# EAGLE board stripboard (EAGLE 7.7.0)
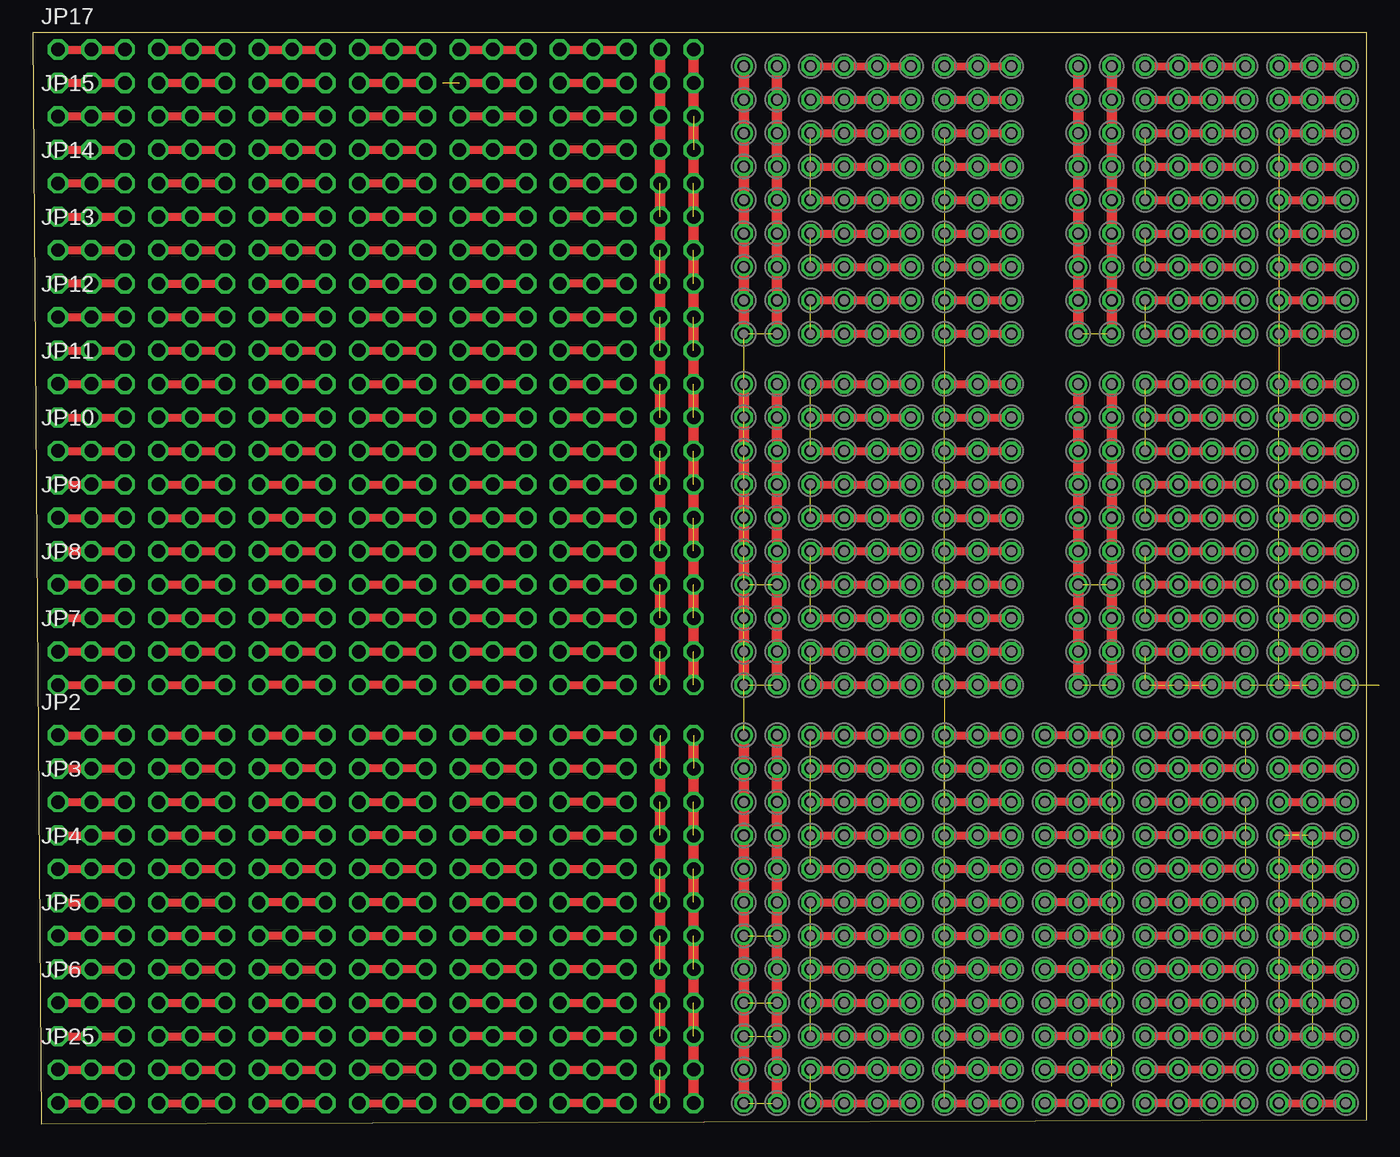
[diagram p0: board, top side]

Size 101.27 x 82.86 mm. Coordinates in mm from the lower left corner, seen from the top.
Outline: 0.64,0 101.27,0.32 101.27,82.86 0,82.86 0.64,0
Copper layers (1*16): Top 0.035mm / dielectric 1.5mm / Bottom 0.035mm
Design rules "default": minimum track width 10mil, minimum drill 24mil, track to track 8mil, track to pad 8mil, pad to pad 8mil, via to via 8mil, smd to smd 8mil, copper to edge 40mil, drill to drill 8mil, minimum pad ring 10mil, minimum via ring 8mil, stop-mask expansion 4mil, vias tented up to drill 0mil, thermal gap 10mil

## Footprints (pad centres in the part's own frame; a part is rotated, then mirrored left to right if it is on the bottom)
FE09-2 = drill 0.914: 1 -10.16,1.27 | drill 0.914 octagon: 2 -10.16,-1.27; 3 -7.62,1.27; 4 -7.62,-1.27; 5 -5.08,1.27; 6 -5.08,-1.27; 7 -2.54,1.27; 8 -2.54,-1.27; 9 0,1.27; 10 0,-1.27; 11 2.54,1.27; 12 2.54,-1.27; 13 5.08,1.27; 14 5.08,-1.27; 15 7.62,1.27; 16 7.62,-1.27; 17 10.16,1.27; 18 10.16,-1.27
2X20 = drill 1.016 octagon: 1 -24.13,-1.27; 2 -24.13,1.27; 3 -21.59,-1.27; 4 -21.59,1.27; 5 -19.05,-1.27; 6 -19.05,1.27; 7 -16.51,-1.27; 8 -16.51,1.27; 9 -13.97,-1.27; 10 -13.97,1.27; 11 -11.43,-1.27; 12 -11.43,1.27; 13 -8.89,-1.27; 14 -8.89,1.27; 15 -6.35,-1.27; 16 -6.35,1.27; 17 -3.81,-1.27; 18 -3.81,1.27; 19 -1.27,-1.27; 20 -1.27,1.27; 21 1.27,-1.27; 22 1.27,1.27; 23 3.81,-1.27; 24 3.81,1.27; 25 6.35,-1.27; 26 6.35,1.27; 27 8.89,-1.27; 28 8.89,1.27; 29 11.43,-1.27; 30 11.43,1.27; 31 13.97,-1.27; 32 13.97,1.27; 33 16.51,-1.27; 34 16.51,1.27; 35 19.05,-1.27; 36 19.05,1.27; 37 21.59,-1.27; 38 21.59,1.27; 39 24.13,-1.27; 40 24.13,1.27

## Placement (x,y rotation side)
E$1  [FE09-2]  64.14,73.98 0 top
E$2  [FE09-2]  64.14,68.9 0 top
E$3  [FE09-2]  64.14,68.9 0 top
E$4  [FE09-2]  64.14,63.82 0 top
E$5  [FE09-2]  64.14,79.06 0 top
E$6  [FE09-2]  89.54,73.98 0 top
E$7  [FE09-2]  89.54,68.9 0 top
E$8  [FE09-2]  89.54,68.9 0 top
E$9  [FE09-2]  64.14,63.82 0 top
E$10  [FE09-2]  64.14,61.28 0 top
E$11  [FE09-2]  64.14,61.28 0 top
E$12  [FE09-2]  64.14,54.93 0 top
E$13  [FE09-2]  89.54,63.82 0 top
E$14  [FE09-2]  89.54,63.82 0 top
E$15  [FE09-2]  89.54,61.28 0 top
E$16  [FE09-2]  89.54,61.28 0 top
E$17  [FE09-2]  64.14,54.93 0 top
E$18  [FE09-2]  64.14,49.85 0 top
E$19  [FE09-2]  64.14,49.85 0 top
E$20  [FE09-2]  64.14,44.77 0 top
E$21  [FE09-2]  89.54,54.93 0 top
E$22  [FE09-2]  89.54,54.93 0 top
E$23  [FE09-2]  89.54,49.85 0 top
E$24  [FE09-2]  89.54,49.85 0 top
E$25  [FE09-2]  64.14,44.77 0 top
E$26  [FE09-2]  64.14,39.69 0 top
E$27  [FE09-2]  64.14,39.69 0 top
E$28  [FE09-2]  64.14,34.61 0 top
E$29  [FE09-2]  89.54,44.77 0 top
E$30  [FE09-2]  89.54,44.77 0 top
E$31  [FE09-2]  89.54,39.69 0 top
E$32  [FE09-2]  89.54,39.69 0 top
E$33  [FE09-2]  89.54,34.61 0 top
E$34  [FE09-2]  89.54,79.06 0 top
E$35  [FE09-2]  64.14,28.26 0 top
E$36  [FE09-2]  64.14,28.26 0 top
E$37  [FE09-2]  64.14,23.18 0 top
E$38  [FE09-2]  64.14,23.18 0 top
E$39  [FE09-2]  64.14,18.1 0 top
E$40  [FE09-2]  64.14,18.1 0 top
E$41  [FE09-2]  64.14,13.02 0 top
E$42  [FE09-2]  64.14,13.02 0 top
E$43  [FE09-2]  64.14,7.94 0 top
E$44  [FE09-2]  64.14,23.18 0 top
E$45  [FE09-2]  64.14,23.18 0 top
E$46  [FE09-2]  64.14,18.1 0 top
E$47  [FE09-2]  64.14,18.1 0 top
E$48  [FE09-2]  64.14,13.02 0 top
E$49  [FE09-2]  64.14,13.02 0 top
E$50  [FE09-2]  64.14,7.94 0 top
E$51  [FE09-2]  64.14,7.94 0 top
E$52  [FE09-2]  64.14,2.86 0 top
E$53  [FE09-2]  87,7.94 180 top
E$54  [FE09-2]  87,7.94 180 top
E$55  [FE09-2]  87,13.02 180 top
E$56  [FE09-2]  87,13.02 180 top
E$57  [FE09-2]  87,18.1 180 top
E$58  [FE09-2]  87,18.1 180 top
E$59  [FE09-2]  87,23.18 180 top
E$60  [FE09-2]  87,23.18 180 top
E$61  [FE09-2]  87,28.26 180 top
E$62  [FE09-2]  87,2.86 180 top
E$63  [FE09-2]  98.43,19.37 90 top
E$64  [FE09-2]  98.43,11.75 90 top
JP2  [2X20]  26.04,28.26 0 top
JP3  [2X20]  26.04,23.18 0 top
JP4  [2X20]  26.04,18.1 0 top
JP5  [2X20]  26.04,13.02 0 top
JP6  [2X20]  26.04,7.94 0 top
JP7  [2X20]  26.04,34.61 0 top
JP8  [2X20]  26.04,39.69 0 top
JP9  [2X20]  26.04,44.77 0 top
JP10  [2X20]  26.04,49.85 0 top
JP11  [2X20]  26.04,54.93 0 top
JP12  [2X20]  26.04,60.01 0 top
JP13  [2X20]  26.04,65.09 0 top
JP14  [2X20]  26.04,70.17 0 top
JP15  [2X20]  26.04,75.25 0 top
JP17  [2X20]  26.04,80.33 0 top
JP25  [2X20]  26.04,2.86 0 top

## Library data of the parts
E$1-E$64 = con-lsta
JP2-JP15 JP17 JP25 = adafruit

## Nets
N$1: JP25.2 JP25.6
N$2: JP25.8 JP25.12
N$3: JP25.14 JP25.18
N$4: JP25.20 JP25.24
N$5: JP25.26 JP25.30
N$6: JP25.32 JP25.36
N$7: JP25.37 JP25.38
N$9: JP25.1 JP25.5
N$10: JP25.7 JP25.11
N$11: JP25.13 JP25.17
N$12: JP25.19 JP25.23
N$13: JP25.25 JP25.29
N$14: JP25.31 JP25.35
N$29: JP2.2 JP2.6
N$30: JP2.8 JP2.12
N$31: JP2.14 JP2.18
N$32: JP2.20 JP2.24
N$33: JP2.26 JP2.30
N$34: JP2.32 JP2.36
N$35: JP2.37 JP2.38
N$36: JP2.39 JP2.40
N$37: JP2.1 JP2.5
N$38: JP2.7 JP2.11
N$39: JP2.13 JP2.17
N$40: JP2.19 JP2.23
N$41: JP2.25 JP2.29
N$42: JP2.31 JP2.35
N$43: JP3.2 JP3.6
N$44: JP3.8 JP3.12
N$45: JP3.14 JP3.18
N$46: JP3.20 JP3.24
N$47: JP3.26 JP3.30
N$48: JP3.32 JP3.36
N$49: JP3.37 JP3.38
N$50: JP3.39 JP3.40
N$51: JP3.1 JP3.5
N$52: JP3.7 JP3.11
N$53: JP3.13 JP3.17
N$54: JP3.19 JP3.23
N$55: JP3.25 JP3.29
N$56: JP3.31 JP3.35
N$57: JP4.2 JP4.6
N$58: JP4.8 JP4.12
N$59: JP4.14 JP4.18
N$60: JP4.20 JP4.24
N$61: JP4.26 JP4.30
N$62: JP4.32 JP4.36
N$63: JP4.37 JP4.38
N$64: JP4.39 JP4.40
N$65: JP4.1 JP4.5
N$66: JP4.7 JP4.11
N$67: JP4.13 JP4.17
N$68: JP4.19 JP4.23
N$69: JP4.25 JP4.29
N$70: JP4.31 JP4.35
N$71: JP5.2 JP5.6
N$72: JP5.8 JP5.12
N$73: JP5.14 JP5.18
N$74: JP5.20 JP5.24
N$75: JP5.26 JP5.30
N$76: JP5.32 JP5.36
N$77: JP5.37 JP5.38
N$78: JP5.39 JP5.40
N$79: JP5.1 JP5.5
N$80: JP5.7 JP5.11
N$81: JP5.13 JP5.17
N$82: JP5.19 JP5.23
N$83: JP5.25 JP5.29
N$84: JP5.31 JP5.35
N$85: JP6.2 JP6.6
N$86: JP6.8 JP6.12
N$87: JP6.14 JP6.18
N$88: JP6.20 JP6.24
N$89: JP6.26 JP6.30
N$90: JP6.32 JP6.36
N$91: JP6.37 JP6.38
N$92: JP6.39 JP6.40
N$93: JP6.1 JP6.5
N$94: JP6.7 JP6.11
N$95: JP6.13 JP6.17
N$96: JP6.19 JP6.23
N$97: JP6.25 JP6.29
N$98: JP6.31 JP6.35
N$99: JP7.2 JP7.6
N$100: JP7.8 JP7.12
N$101: JP7.14 JP7.18
N$102: JP7.20 JP7.24
N$103: JP7.26 JP7.30
N$104: JP7.32 JP7.36
N$105: JP7.37 JP7.38
N$106: JP7.39 JP7.40
N$107: JP7.1 JP7.5
N$108: JP7.7 JP7.11
N$109: JP7.13 JP7.17
N$110: JP7.19 JP7.23
N$111: JP7.25 JP7.29
N$112: JP7.31 JP7.35
N$113: JP8.2 JP8.6
N$114: JP8.8 JP8.12
N$115: JP8.14 JP8.18
N$116: JP8.20 JP8.24
N$117: JP8.26 JP8.30
N$118: JP8.32 JP8.36
N$119: JP8.37 JP8.38
N$120: JP8.39 JP8.40
N$121: JP8.1 JP8.5
N$122: JP8.7 JP8.11
N$123: JP8.13 JP8.17
N$124: JP8.19 JP8.23
N$125: JP8.25 JP8.29
N$126: JP8.31 JP8.35
N$127: JP9.2 JP9.6
N$128: JP9.8 JP9.12
N$129: JP9.14 JP9.18
N$130: JP9.20 JP9.24
N$131: JP9.26 JP9.30
N$132: JP9.32 JP9.36
N$133: JP9.37 JP9.38
N$134: JP9.39 JP9.40
N$135: JP9.1 JP9.5
N$136: JP9.7 JP9.11
N$137: JP9.13 JP9.17
N$138: JP9.19 JP9.23
N$139: JP9.25 JP9.29
N$140: JP9.31 JP9.35
N$141: JP10.2 JP10.6
N$142: JP10.8 JP10.12
N$143: JP10.14 JP10.18
N$144: JP10.20 JP10.24
N$145: JP10.26 JP10.30
N$146: JP10.32 JP10.36
N$147: JP10.37 JP10.38
N$148: JP10.39 JP10.40
N$149: JP10.1 JP10.5
N$150: JP10.7 JP10.11
N$151: JP10.13 JP10.17
N$152: JP10.19 JP10.23
N$153: JP10.25 JP10.29
N$154: JP10.31 JP10.35
N$155: JP11.2 JP11.6
N$156: JP11.8 JP11.12
N$157: JP11.14 JP11.18
N$158: JP11.20 JP11.24
N$159: JP11.26 JP11.30
N$160: JP11.32 JP11.36
N$161: JP11.37 JP11.38
N$162: JP11.39 JP11.40
N$163: JP11.1 JP11.5
N$164: JP11.7 JP11.11
N$165: JP11.13 JP11.17
N$166: JP11.19 JP11.23
N$167: JP11.25 JP11.29
N$168: JP11.31 JP11.35
N$169: JP12.2 JP12.6
N$170: JP12.8 JP12.12
N$171: JP12.14 JP12.18
N$172: JP12.20 JP12.24
N$173: JP12.26 JP12.30
N$174: JP12.32 JP12.36
N$175: JP12.37 JP12.38
N$176: JP12.39 JP12.40
N$177: JP12.1 JP12.5
N$178: JP12.7 JP12.11
N$179: JP12.13 JP12.17
N$180: JP12.19 JP12.23
N$181: JP12.25 JP12.29
N$182: JP12.31 JP12.35
N$183: JP13.2 JP13.6
N$184: JP13.8 JP13.12
N$185: JP13.14 JP13.18
N$186: JP13.20 JP13.24
N$187: JP13.26 JP13.30
N$188: JP13.32 JP13.36
N$189: JP13.37 JP13.38
N$190: JP13.39 JP13.40
N$191: JP13.1 JP13.5
N$192: JP13.7 JP13.11
N$193: JP13.13 JP13.17
N$194: JP13.19 JP13.23
N$195: JP13.25 JP13.29
N$196: JP13.31 JP13.35
N$197: JP14.2 JP14.6
N$198: JP14.8 JP14.12
N$199: JP14.14 JP14.18
N$200: JP14.20 JP14.24
N$201: JP14.26 JP14.30
N$202: JP14.32 JP14.36
N$203: JP14.37 JP14.38
N$204: JP14.39 JP14.40
N$205: JP14.1 JP14.5
N$206: JP14.7 JP14.11
N$207: JP14.13 JP14.17
N$208: JP14.19 JP14.23
N$209: JP14.25 JP14.29
N$210: JP14.31 JP14.35
N$211: JP15.2 JP15.6
N$212: JP15.8 JP15.12
N$213: JP15.14 JP15.18
N$214: JP15.20 JP15.24
N$215: JP15.26 JP15.30
N$216: JP15.32 JP15.36
N$218: JP15.39 JP15.40
N$219: JP15.1 JP15.5
N$220: JP15.7 JP15.11
N$221: JP15.13 JP15.17
N$222: JP15.19 JP15.23
N$223: JP15.25 JP15.29
N$224: JP15.31 JP15.35

## Tracks (layer width: path | path; a pad name or v marks a point on that pad's centre or on a via)
N$1
  Top 0.61: JP25.2 JP25.6
N$2
  Top 0.61: JP25.8 JP25.12
N$3
  Top 0.61: JP25.14 JP25.18
N$4
  Top 0.61: JP25.24 JP25.20
N$5
  Top 0.61: JP25.26 JP25.30
N$6
  Top 0.61: JP25.32 JP25.36
N$7  (1 unrouted)
N$8  (1 unrouted)
  Top 0.813: 53.98,40.96 53.98,56.2 | 56.52,40.96 56.52,56.2
N$9
  Top 0.61: JP25.1 JP25.5
N$10
  Top 0.61: JP25.7 JP25.11
N$11
  Top 0.61: JP25.13 JP25.17
N$12
  Top 0.61: JP25.19 JP25.23
N$13
  Top 0.61: JP25.29 JP25.25
N$14
  Top 0.61: JP25.35 JP25.31
N$15  (1 unrouted)
  Top 0.813: 53.98,14.29 53.98,29.53 | 56.52,14.29 56.52,29.53
N$16  (1 unrouted)
  Top 0.61: 59.05,16.83 66.68,16.83 | 59.05,14.29 66.68,14.29
N$17  (1 unrouted)
  Top 0.61: 59.05,21.91 66.68,21.91 | 59.05,19.37 66.68,19.37
N$18  (1 unrouted)
  Top 0.61: 59.05,26.99 66.68,26.99 | 59.05,24.45 66.68,24.45
N$19  (1 unrouted)
  Top 0.61: 59.05,29.53 66.68,29.53 | 59.05,26.99 66.68,26.99
N$20  (10 unrouted)
  Top 0.61: 69.22,29.53 74.3,29.53 | 69.22,26.99 74.3,26.99 | 69.22,24.45 74.3,24.45 | 69.22,21.91 74.3,21.91 | 69.22,19.37 74.3,19.37 | 69.22,16.83 74.3,16.83 | 69.22,14.29 74.3,14.29 | 69.22,11.75 74.3,11.75 | 69.22,9.21 74.3,9.21 | 69.22,6.67 74.3,6.67
N$21  (1 unrouted)
  Top 0.813: 53.98,6.67 53.98,21.91 | 56.52,6.67 56.52,21.91
N$22  (2 unrouted)
  Top 0.813: 53.98,60.01 53.98,80.33 | 56.52,60.01 56.52,80.33
N$23  (1 unrouted)
  Top 0.61: 59.05,9.21 66.68,9.21 | 59.05,6.67 66.68,6.67
N$24  (1 unrouted)
  Top 0.61: 59.05,14.29 66.68,14.29 | 59.05,11.75 66.68,11.75
N$25  (1 unrouted)
  Top 0.813: 53.98,9.21 53.98,24.45 | 56.52,9.21 56.52,24.45
N$26  (1 unrouted)
  Top 0.61: 59.05,11.75 66.68,11.75 | 59.05,9.21 66.68,9.21
N$27  (1 unrouted)
  Top 0.61: 59.05,16.83 66.68,16.83 | 59.05,14.29 66.68,14.29
N$28  (1 unrouted)
  Top 0.61: 59.05,21.91 66.68,21.91 | 59.05,19.37 66.68,19.37
N$29
  Top 0.61: JP2.2 JP2.6
N$30
  Top 0.61: JP2.8 JP2.12
N$31
  Top 0.61: JP2.14 JP2.18
N$32
  Top 0.61: JP2.20 JP2.24
N$33
  Top 0.61: JP2.26 JP2.30
N$34
  Top 0.61: JP2.36 JP2.32
N$35  (1 unrouted)
  Top 0.813: JP2.38 47.62,1.59
N$36  (1 unrouted)
  Top 0.813: JP2.40 50.16,1.59
N$37
  Top 0.61: JP2.1 JP2.5
N$38
  Top 0.61: JP2.7 JP2.11
N$39
  Top 0.61: JP2.17 JP2.13
N$40
  Top 0.61: JP2.23 JP2.19
N$41
  Top 0.61: JP2.25 JP2.29
N$42
  Top 0.61: JP2.31 JP2.35
N$43
  Top 0.61: JP3.2 JP3.6
N$44
  Top 0.61: JP3.8 JP3.12
N$45
  Top 0.61: JP3.14 JP3.18
N$46
  Top 0.61: JP3.20 JP3.24
N$47
  Top 0.61: JP3.30 JP3.26
N$48
  Top 0.61: JP3.36 JP3.32
N$49  (1 unrouted)
N$50  (1 unrouted)
N$51
  Top 0.61: JP3.1 JP3.5
N$52
  Top 0.61: JP3.7 JP3.11
N$53
  Top 0.61: JP3.17 JP3.13
N$54
  Top 0.61: JP3.23 JP3.19
N$55
  Top 0.61: JP3.29 JP3.25
N$56
  Top 0.61: JP3.31 JP3.35
N$57
  Top 0.61: JP4.2 JP4.6
N$58
  Top 0.61: JP4.8 JP4.12
N$59
  Top 0.61: JP4.14 JP4.18
N$60
  Top 0.61: JP4.20 JP4.24
N$61
  Top 0.61: JP4.26 JP4.30
N$62
  Top 0.61: JP4.32 JP4.36
N$63  (1 unrouted)
N$64  (1 unrouted)
N$65
  Top 0.61: JP4.1 JP4.5
N$66
  Top 0.61: JP4.7 JP4.11
N$67
  Top 0.61: JP4.17 JP4.13
N$68
  Top 0.61: JP4.23 JP4.19
N$69
  Top 0.61: JP4.29 JP4.25
N$70
  Top 0.61: JP4.35 JP4.31
N$71
  Top 0.61: JP5.2 JP5.6
N$72
  Top 0.61: JP5.8 JP5.12
N$73
  Top 0.61: JP5.18 JP5.14
N$74
  Top 0.61: JP5.20 JP5.24
N$75
  Top 0.61: JP5.26 JP5.30
N$76
  Top 0.61: JP5.32 JP5.36
N$77  (1 unrouted)
N$78  (1 unrouted)
N$79
  Top 0.61: JP5.1 JP5.5
N$80
  Top 0.61: JP5.7 JP5.11
N$81
  Top 0.61: JP5.13 JP5.17
N$82
  Top 0.61: JP5.23 JP5.19
N$83
  Top 0.61: JP5.29 JP5.25
N$84
  Top 0.61: JP5.35 JP5.31
N$85
  Top 0.61: JP6.2 JP6.6
N$86
  Top 0.61: JP6.8 JP6.12
N$87
  Top 0.61: JP6.14 JP6.18
N$88
  Top 0.61: JP6.20 JP6.24
N$89
  Top 0.61: JP6.26 JP6.30
N$90
  Top 0.61: JP6.32 JP6.36
N$91  (1 unrouted)
N$92  (1 unrouted)
N$93
  Top 0.61: JP6.1 JP6.5
N$94
  Top 0.61: JP6.7 JP6.11
N$95
  Top 0.61: JP6.17 JP6.13
N$96
  Top 0.61: JP6.23 JP6.19
N$97
  Top 0.61: JP6.29 JP6.25
N$98
  Top 0.61: JP6.35 JP6.31
N$99
  Top 0.61: JP7.2 JP7.6
N$100
  Top 0.61: JP7.8 JP7.12
N$101
  Top 0.61: JP7.14 JP7.18
N$102
  Top 0.61: JP7.20 JP7.24
N$103
  Top 0.61: JP7.26 JP7.30
N$104
  Top 0.61: JP7.36 JP7.32
N$105  (1 unrouted)
  Top 0.813: JP7.37 47.62,81.6
N$106  (1 unrouted)
N$107
  Top 0.61: JP7.1 JP7.5
N$108
  Top 0.61: JP7.7 JP7.11
N$109
  Top 0.61: JP7.17 JP7.13
N$110
  Top 0.61: JP7.23 JP7.19
N$111
  Top 0.61: JP7.29 JP7.25
N$112
  Top 0.61: JP7.31 JP7.35
N$113
  Top 0.61: JP8.2 JP8.6
N$114
  Top 0.61: JP8.8 JP8.12
N$115
  Top 0.61: JP8.18 JP8.14
N$116
  Top 0.61: JP8.20 JP8.24
N$117
  Top 0.61: JP8.30 JP8.26
N$118
  Top 0.61: JP8.36 JP8.32
N$119  (1 unrouted)
N$120  (1 unrouted)
N$121
  Top 0.61: JP8.1 JP8.5
N$122
  Top 0.61: JP8.7 JP8.11
N$123
  Top 0.61: JP8.17 JP8.13
N$124
  Top 0.61: JP8.23 JP8.19
N$125
  Top 0.61: JP8.25 JP8.29
N$126
  Top 0.61: JP8.31 JP8.35
N$127
  Top 0.61: JP9.2 JP9.6
N$128
  Top 0.61: JP9.8 JP9.12
N$129
  Top 0.61: JP9.18 JP9.14
N$130
  Top 0.61: JP9.24 JP9.20
N$131
  Top 0.61: JP9.26 JP9.30
N$132
  Top 0.61: JP9.32 JP9.36
N$133  (1 unrouted)
N$134  (1 unrouted)
N$135
  Top 0.61: JP9.1 JP9.5
N$136
  Top 0.61: JP9.7 JP9.11
N$137
  Top 0.61: JP9.13 JP9.17
N$138
  Top 0.61: JP9.19 JP9.23
N$139
  Top 0.61: JP9.25 JP9.29
N$140
  Top 0.61: JP9.31 JP9.35
N$141
  Top 0.61: JP10.2 JP10.6
N$142
  Top 0.61: JP10.8 JP10.12
N$143
  Top 0.61: JP10.14 JP10.18
N$144
  Top 0.61: JP10.20 JP10.24
N$145
  Top 0.61: JP10.26 JP10.30
N$146
  Top 0.61: JP10.32 JP10.36
N$147  (1 unrouted)
N$148  (1 unrouted)
N$149
  Top 0.61: JP10.1 JP10.5
N$150
  Top 0.61: JP10.7 JP10.11
N$151
  Top 0.61: JP10.13 JP10.17
N$152
  Top 0.61: JP10.19 JP10.23
N$153
  Top 0.61: JP10.25 JP10.29
N$154
  Top 0.61: JP10.35 JP10.31
N$155
  Top 0.61: JP11.2 JP11.6
N$156
  Top 0.61: JP11.8 JP11.12
N$157
  Top 0.61: JP11.14 JP11.18
N$158
  Top 0.61: JP11.20 JP11.24
N$159
  Top 0.61: JP11.26 JP11.30
N$160
  Top 0.61: JP11.32 JP11.36
N$161  (1 unrouted)
N$162  (1 unrouted)
N$163
  Top 0.61: JP11.1 JP11.5
N$164
  Top 0.61: JP11.7 JP11.11
N$165
  Top 0.61: JP11.13 JP11.17
N$166
  Top 0.61: JP11.19 JP11.23
N$167
  Top 0.61: JP11.25 JP11.29
N$168
  Top 0.61: JP11.35 JP11.31
N$169
  Top 0.61: JP12.2 JP12.6
N$170
  Top 0.61: JP12.8 JP12.12
N$171
  Top 0.61: JP12.14 JP12.18
N$172
  Top 0.61: JP12.20 JP12.24
N$173
  Top 0.61: JP12.26 JP12.30
N$174
  Top 0.61: JP12.32 JP12.36
N$175  (1 unrouted)
N$176  (1 unrouted)
N$177
  Top 0.61: JP12.1 JP12.5
N$178
  Top 0.61: JP12.7 JP12.11
N$179
  Top 0.61: JP12.13 JP12.17
N$180
  Top 0.61: JP12.19 JP12.23
N$181
  Top 0.61: JP12.25 JP12.29
N$182
  Top 0.61: JP12.35 JP12.31
N$183
  Top 0.61: JP13.2 JP13.6
N$184
  Top 0.61: JP13.8 JP13.12
N$185
  Top 0.61: JP13.14 JP13.18
N$186
  Top 0.61: JP13.20 JP13.24
N$187
  Top 0.61: JP13.26 JP13.30
N$188
  Top 0.61: JP13.32 JP13.36
N$189  (1 unrouted)
N$190  (1 unrouted)
N$191
  Top 0.61: JP13.5 JP13.1
N$192
  Top 0.61: JP13.7 JP13.11
N$193
  Top 0.61: JP13.13 JP13.17
N$194
  Top 0.61: JP13.19 JP13.23
N$195
  Top 0.61: JP13.25 JP13.29
N$196
  Top 0.61: JP13.35 JP13.31
N$197
  Top 0.61: JP14.2 JP14.6
N$198
  Top 0.61: JP14.8 JP14.12
N$199
  Top 0.61: JP14.14 JP14.18
N$200
  Top 0.61: JP14.20 JP14.24
N$201
  Top 0.61: JP14.26 JP14.30
N$202
  Top 0.61: JP14.32 JP14.36
N$203  (1 unrouted)
N$204  (1 unrouted)
N$205
  Top 0.61: JP14.1 JP14.5
N$206
  Top 0.61: JP14.7 JP14.11
N$207
  Top 0.61: JP14.13 JP14.17
N$208
  Top 0.61: JP14.19 JP14.23
N$209
  Top 0.61: JP14.25 JP14.29
N$210
  Top 0.61: JP14.35 JP14.31
N$211  (1 unrouted)
  Top 0.61: JP15.2 JP15.6 | 1.91,79.06 6.98,79.06 | 1.91,81.6 6.98,81.6 | 9.53,81.6 14.61,81.6 | 9.53,79.06 14.61,79.06 | 17.15,79.06 22.23,79.06 | 17.15,81.6 22.23,81.6 | 24.77,81.6 29.85,81.6 | 24.77,79.06 29.85,79.06 | 32.38,79.06 36.2,79.06 37.46,79.06 | 32.38,81.6 37.46,81.6 | 40,81.6 45.09,81.6 | 40,79.06 45.09,79.06
N$212
  Top 0.61: JP15.8 JP15.12
N$213
  Top 0.61: JP15.14 JP15.18
N$214
  Top 0.61: JP15.20 JP15.24
N$215
  Top 0.61: JP15.26 JP15.30
N$216
  Top 0.61: JP15.32 JP15.36
N$217  (1 unrouted)
  Top 0.61: 59.05,43.5 66.68,43.5 | 59.05,40.96 66.68,40.96
N$218  (1 unrouted)
  Top 0.813: 50.16,33.34 JP15.40 50.16,81.6
N$219
  Top 0.61: JP15.1 JP15.5
N$220
  Top 0.61: JP15.7 JP15.11
N$221
  Top 0.61: JP15.13 JP15.17
N$222
  Top 0.61: JP15.19 JP15.23
N$223
  Top 0.61: JP15.25 JP15.29
N$224
  Top 0.61: JP15.35 JP15.31
N$225  (1 unrouted)
  Top 0.61: 59.05,48.58 66.68,48.58 | 59.05,46.04 66.68,46.04
N$226  (1 unrouted)
  Top 0.61: 59.05,53.66 66.68,53.66 | 59.05,51.12 66.68,51.12
N$227  (1 unrouted)
  Top 0.61: 59.05,56.2 66.68,56.2 | 59.05,53.66 66.68,53.66
N$228  (1 unrouted)
  Top 0.813: 79.38,60.01 79.38,80.33 | 81.92,60.01 81.92,80.33
N$229  (1 unrouted)
  Top 0.61: 59.05,67.63 66.68,67.63 | 59.05,65.09 66.68,65.09
N$230  (1 unrouted)
  Top 0.61: 59.05,72.71 66.68,72.71 | 59.05,70.17 66.68,70.17
N$231  (1 unrouted)
  Top 0.61: 59.05,24.45 66.68,24.45 | 59.05,21.91 66.68,21.91
N$232  (10 unrouted)
  Top 0.61: 69.22,24.45 74.3,24.45 | 69.22,21.91 74.3,21.91 | 69.22,19.37 74.3,19.37 | 69.22,16.83 74.3,16.83 | 69.22,14.29 74.3,14.29 | 69.22,11.75 74.3,11.75 | 69.22,9.21 74.3,9.21 | 69.22,6.67 74.3,6.67 | 69.22,4.13 74.3,4.13 | 69.22,1.59 74.3,1.59
N$233  (1 unrouted)
  Top 0.813: 53.98,1.59 53.98,16.83 | 56.52,1.59 56.52,16.83
N$234  (1 unrouted)
  Top 0.61: 59.05,4.13 66.68,4.13 | 59.05,1.59 66.68,1.59
N$235  (1 unrouted)
  Top 0.61: 59.05,9.21 66.68,9.21 | 59.05,6.67 66.68,6.67
N$236  (3 unrouted)
N$237  (1 unrouted)
  Top 0.61: 92.08,19.37 84.45,19.37 | 92.08,21.91 84.45,21.91
N$238  (1 unrouted)
  Top 0.61: 92.08,14.29 84.45,14.29 | 92.08,16.83 84.45,16.83
N$239  (1 unrouted)
  Top 0.61: 92.08,9.21 84.45,9.21 | 92.08,11.75 84.45,11.75
N$240  (1 unrouted)
  Top 0.61: 92.08,6.67 84.45,6.67 | 92.08,9.21 84.45,9.21 | 92.08,4.13 84.45,4.13 | 92.08,1.59 84.45,1.59
N$241  (10 unrouted)
  Top 0.61: 81.92,6.67 76.84,6.67 | 81.92,9.21 76.84,9.21 | 81.92,11.75 76.84,11.75 | 81.92,14.29 76.84,14.29 | 81.92,16.83 76.84,16.83 | 81.92,19.37 76.84,19.37 | 81.92,21.91 76.84,21.91 | 81.92,24.45 76.84,24.45 | 81.92,26.99 76.84,26.99 | 81.92,29.53 76.84,29.53 | 81.92,4.13 76.84,4.13 | 81.92,1.59 76.84,1.59
N$243  (1 unrouted)
  Top 0.61: 92.08,26.99 84.45,26.99 | 92.08,29.53 84.45,29.53
N$244  (1 unrouted)
  Top 0.61: 92.08,21.91 84.45,21.91 | 92.08,24.45 84.45,24.45
N$291  (1 unrouted)
  Top 0.61: 84.45,62.55 92.08,62.55 | 84.45,60.01 92.08,60.01
N$292  (1 unrouted)
  Top 0.61: 84.45,67.63 92.08,67.63 | 84.45,65.09 92.08,65.09
N$293  (1 unrouted)
  Top 0.61: 84.45,72.71 92.08,72.71 | 84.45,70.17 92.08,70.17
N$294  (16 unrouted)
  Top 0.61: 69.22,56.2 74.3,56.2 | 69.22,53.66 74.3,53.66 | 69.22,51.12 74.3,51.12 | 69.22,75.25 74.3,75.25 | 69.22,48.58 74.3,48.58 | 69.22,46.04 74.3,46.04 | 69.22,43.5 74.3,43.5 | 69.22,40.96 74.3,40.96 | 69.22,38.42 74.3,38.42 | 69.22,35.88 74.3,35.88 | 69.22,33.34 74.3,33.34 | 69.22,60.01 74.3,60.01 | 69.22,62.55 74.3,62.55 | 69.22,65.09 74.3,65.09 | 69.22,67.63 74.3,67.63 | 69.22,70.17 74.3,70.17 | 69.22,72.71 74.3,72.71 | 69.22,80.33 74.3,80.33 | 69.22,77.79 74.3,77.79
N$295  (1 unrouted)
  Top 0.813: 53.98,33.34 53.98,48.58 | 56.52,33.34 56.52,48.58
N$296  (1 unrouted)
  Top 0.61: 59.05,35.88 66.68,35.88 | 59.05,33.34 66.68,33.34
N$297  (1 unrouted)
  Top 0.61: 59.05,40.96 66.68,40.96 | 59.05,38.42 66.68,38.42
N$300  (1 unrouted)
N$301  (1 unrouted)
N$302  (1 unrouted)
  Top 0.61: 84.45,75.25 92.08,75.25 | 84.45,72.71 92.08,72.71 | 84.45,77.79 92.08,77.79 | 84.45,80.33 92.08,80.33
N$303  (1 unrouted)
  Top 0.813: 79.38,40.96 79.38,56.2 | 81.92,40.96 81.92,56.2
N$304  (1 unrouted)
N$305  (1 unrouted)
  Top 0.61: 84.45,43.5 92.08,43.5 | 84.45,40.96 92.08,40.96
N$306  (1 unrouted)
  Top 0.61: 84.45,48.58 92.08,48.58 | 84.45,46.04 92.08,46.04
N$307  (1 unrouted)
  Top 0.61: 84.45,53.66 92.08,53.66 | 84.45,51.12 92.08,51.12
N$308  (1 unrouted)
  Top 0.61: 84.45,56.2 92.08,56.2 | 84.45,53.66 92.08,53.66
N$309  (16 unrouted)
  Top 0.61: 94.62,56.2 99.7,56.2 | 94.62,53.66 99.7,53.66 | 94.62,51.12 99.7,51.12 | 94.62,75.25 99.7,75.25 | 94.62,48.58 99.7,48.58 | 94.62,46.04 99.7,46.04 | 94.62,43.5 99.7,43.5 | 94.62,40.96 99.7,40.96 | 94.62,38.42 99.7,38.42 | 94.62,35.88 99.7,35.88 | 94.62,33.34 99.7,33.34 | 94.62,60.01 99.7,60.01 | 94.62,62.55 99.7,62.55 | 94.62,65.09 99.7,65.09 | 94.62,67.63 99.7,67.63 | 94.62,70.17 99.7,70.17 | 94.62,72.71 99.7,72.71 | 94.62,80.33 99.7,80.33 | 94.62,77.79 99.7,77.79 | 94.62,29.53 99.7,29.53 | 94.62,26.99 99.7,26.99 | 94.62,24.45 99.7,24.45 | 94.62,21.91 99.7,21.91 | 94.62,19.37 99.7,19.37 | 94.62,1.59 99.7,1.59 | 94.62,16.83 99.7,16.83 | 94.62,14.29 99.7,14.29 | 94.62,11.75 99.7,11.75 | 94.62,9.21 99.7,9.21 | 94.62,6.67 99.7,6.67 | 94.62,4.13 99.7,4.13
N$310  (1 unrouted)
  Top 0.813: 79.38,33.34 79.38,48.58 | 81.92,33.34 81.92,48.58
N$311  (1 unrouted)
  Top 0.61: 84.45,35.88 92.08,35.88 | 84.45,33.34 92.08,33.34
N$312  (1 unrouted)
  Top 0.61: 84.45,40.96 92.08,40.96 | 84.45,38.42 92.08,38.42
N$344  (1 unrouted)
  Top 0.61: 59.05,62.55 66.68,62.55 | 59.05,60.01 66.68,60.01
N$345  (1 unrouted)
  Top 0.61: 59.05,75.25 66.68,75.25 | 59.05,72.71 66.68,72.71 | 59.05,77.79 66.68,77.79 | 59.05,80.33 66.68,80.33
S$9  (1 unrouted)